# Altium PCB input.PcbDoc
Units mm, origin at the board's own origin, x right, y up, seen from the top; angles counter-clockwise.
Board outline 152.4 x 101.6 mm, 2 copper layers (Top Layer, Bottom Layer); 4 components, 40 nets, 80 pads, 0 vias.
Unrouted connection lines stored in the file: 40.
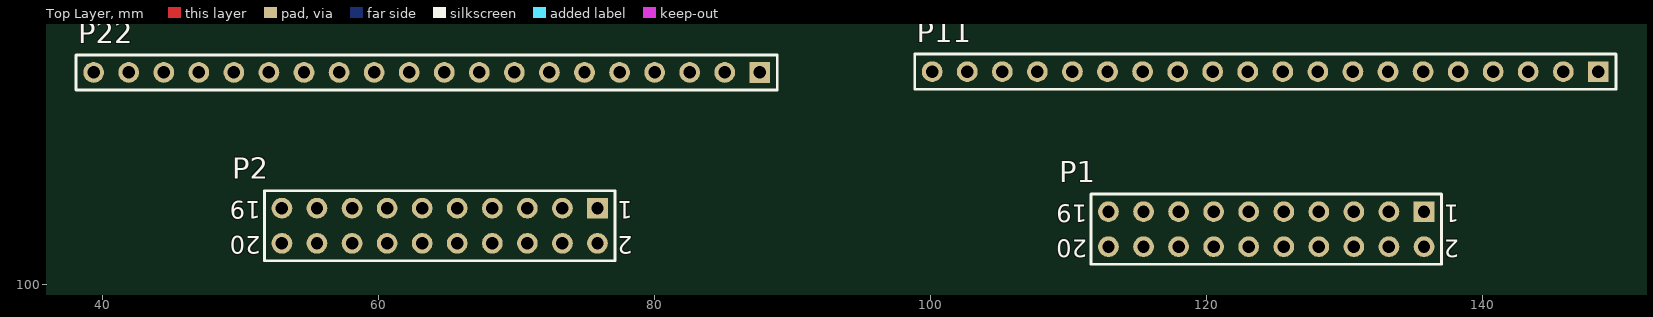
[diagram p0: Top Layer view]
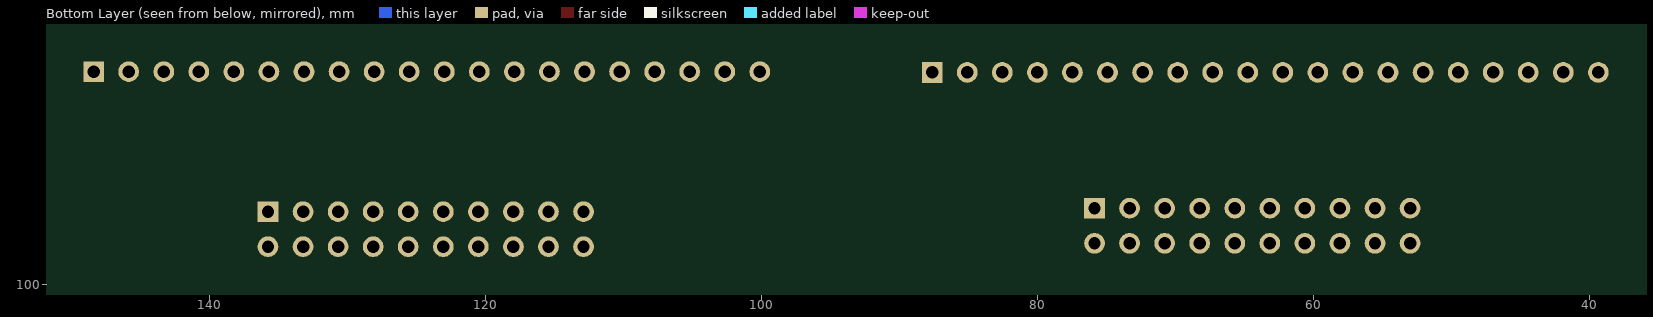
[diagram p1: Bottom Layer view, seen from below]

## Layer stack, top to bottom
Top Layer: signal copper 0.0356
Dielectric: dielectric 0.32, FR-4, Dk 4.8
Bottom Layer: signal copper 0.0356

## Board outline
25.4,25.4 177.8,25.4 177.8,127 25.4,127

## Design rules (kind name [scope] priority, off if disabled: settings)
Clearance [All] p1: gap=0.254
PolygonConnect [All] p1: connectstyle=Relief reliefconductorwidth=0.254 reliefentries=4 polygonreliefangle="90 Angle"
RoutingVias [All] p1: holewidth=0.711 width=1.27 viastyle="Through Hole" minholewidth=0.711 minwidth=1.27 maxholewidth=0.711 maxwidth=1.27
SilkscreenOverComponentPads [All] p1: minsilkscreentomaskgap=0.254
SolderMaskExpansion [All] p1: expansion=0.102
Width [All] p1: maxlimit=0.254 minlimit=0.254 preferedwidth=0.254
27 further rules are at their usual default settings.

## Components (designator, comment, footprint, x,y, rotation, side; value= is the part's Value field where it differs from the comment)
P1 "Header 10X2" HDR2X10 135.738,105.296 r180 top
P2 "Header 10X2" HDR2X10 75.86,105.546 r180 top
P11 "Header 20" HDR1X20 148.368,115.44 r180 top
P22 "Header 20" HDR1X20 87.62,115.384 r180 top

## Footprints (in the part's own frame and the unit in brackets; to place one, negate y for a bottom-side part, rotate by r counter-clockwise, add the part's x,y. Pads: shape width x height; smd on the part's side, far side on the other; paste and mask are expansions set on the pad)
HDR1X20 [mm] "Connector; Header; 20 Position"
  rect 1.5x1.5 hole 0.9: 1(0,0)
  round 1.5 hole 0.9: 2(2.54,0) 3(5.08,0) 4(7.62,0) 5(10.16,0) 6(12.7,0) 7(15.24,0) 8(17.78,0) 9(20.32,0) 10(22.86,0) 11(25.4,0) 12(27.94,0) 13(30.48,0) 14(33.02,0) 15(35.56,0) 16(38.1,0) 17(40.64,0) 18(43.18,0) 19(45.72,0) 20(48.26,0)
  silkscreen extent -1.27,-1.27 49.53,1.27
HDR2X10 [mm] "Connector; Header; 10x2 Position"
  rect 1.5x1.5 hole 0.9: 1(0,0)
  round 1.5 hole 0.9: 2(0,2.54) 3(2.54,0) 4(2.54,2.54) 5(5.08,0) 6(5.08,2.54) 7(7.62,0) 8(7.62,2.54) 9(10.16,0) 10(10.16,2.54) 11(12.7,0) 12(12.7,2.54) 13(15.24,0) 14(15.24,2.54) 15(17.78,0) 16(17.78,2.54) 17(20.32,0) 18(20.32,2.54) 19(22.86,0) 20(22.86,2.54)
  silkscreen extent -1.27,-1.27 24.13,3.81

## Part data
P1 P2: "Header, 10-Pin, Dual row"
P11 P22: "Header, 20-Pin"

## Nets (pads, with @x,y where several pads share a name; then routed paths per layer and width w, separated by ;. In a path a pad name is that pad's centre, name@x,y a point inside that pad or via, vN(x,y) a via of type N, cw(c..) or ccw(c..) an arc to the next point about the centre after c; other vN are vias at no path point)
IN1: P1.19 P11.20
IN2: P1.17 P11.19
IN3: P1.15 P11.18
IN4: P1.13 P11.17
IN5: P1.11 P11.16
IN6: P1.9 P11.15
IN7: P1.7 P11.14
IN8: P1.5 P11.13
IN9: P1.3 P11.12
IN10: P1.1 P11.11
IN11: P1.2 P11.10
IN12: P1.4 P11.9
IN13: P1.6 P11.8
IN14: P1.8 P11.7
IN15: P1.10 P11.6
IN16: P1.12 P11.5
IN17: P1.14 P11.4
IN18: P1.16 P11.3
IN19: P1.18 P11.2
IN20: P1.20 P11.1
IN21: P2.2 P22.20
IN22: P2.4 P22.19
IN23: P2.6 P22.18
IN24: P2.8 P22.17
IN25: P2.10 P22.16
IN26: P2.12 P22.15
IN27: P2.14 P22.14
IN28: P2.16 P22.13
IN29: P2.18 P22.12
IN30: P2.20 P22.11
IN31: P2.19 P22.10
IN32: P2.17 P22.9
IN33: P2.15 P22.8
IN34: P2.13 P22.7
IN35: P2.11 P22.6
IN36: P2.9 P22.5
IN37: P2.7 P22.4
IN38: P2.5 P22.3
IN39: P2.3 P22.2
IN40: P2.1 P22.1

## Text inside footprints (layer, text, board x,y; h text height)
P1: Top Overlay "20" at 111.354,103.264 h1.27 r180; Top Overlay "19" at 111.354,105.804 h1.27 r180; Top Overlay "1" at 138.278,105.804 h1.27 r180; Top Overlay "2" at 138.278,103.264 h1.27 r180
P2: Top Overlay "20" at 51.476,103.514 h1.27 r180; Top Overlay "19" at 51.476,106.054 h1.27 r180; Top Overlay "1" at 78.4,106.054 h1.27 r180; Top Overlay "2" at 78.4,103.514 h1.27 r180